# Altium PCB PS_PCB.PcbDoc
Units mil, origin at the board's own origin, x right, y up, seen from the top; angles counter-clockwise.
Board outline 2200 x 863.97 mil, 4 copper layers (Top Layer, GND, +12, Bottom Layer), stack 23.756 mil thick; 11 components, 5 nets, 28 pads, 5 vias.
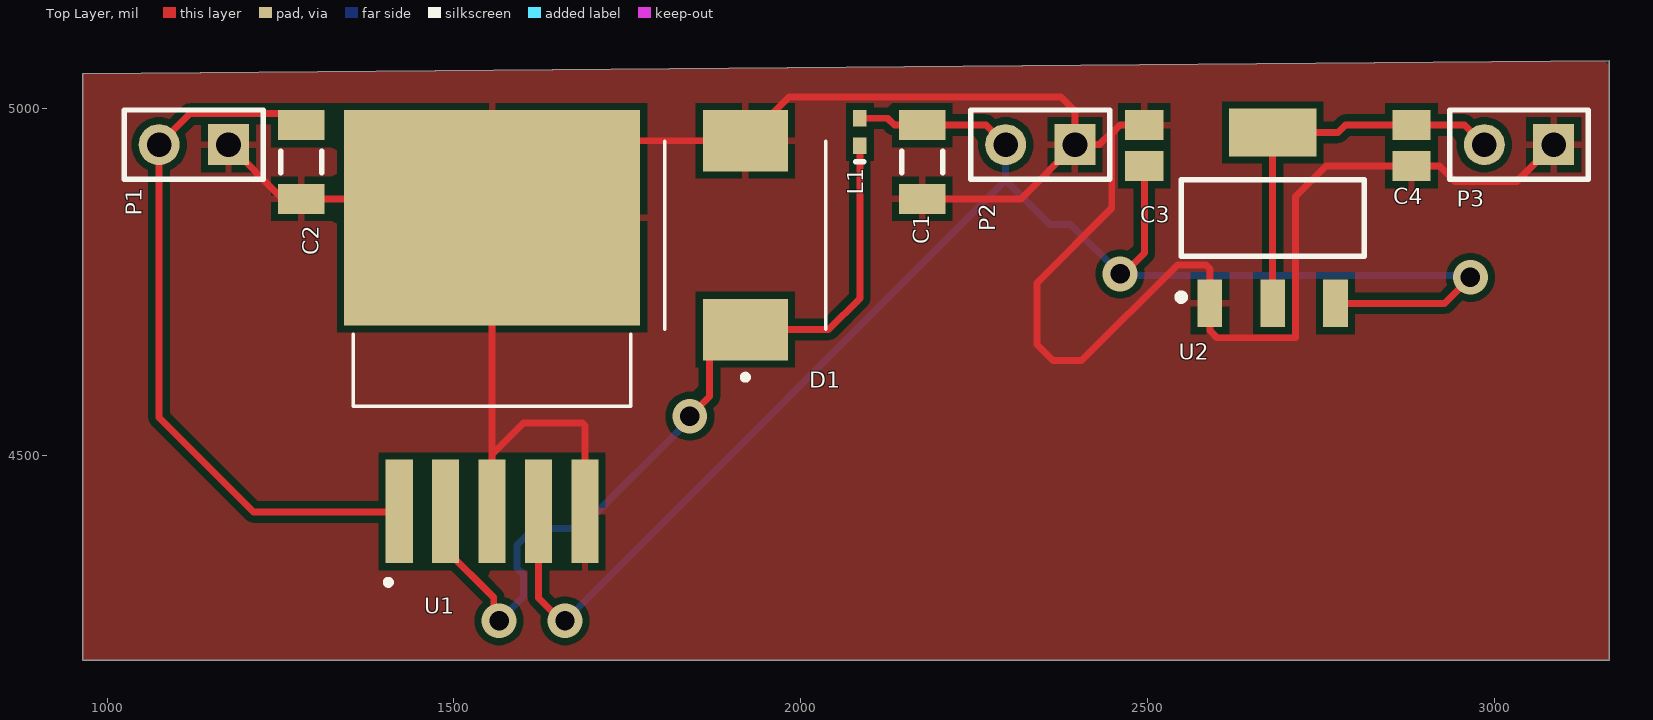
[diagram p0: Top Layer view]
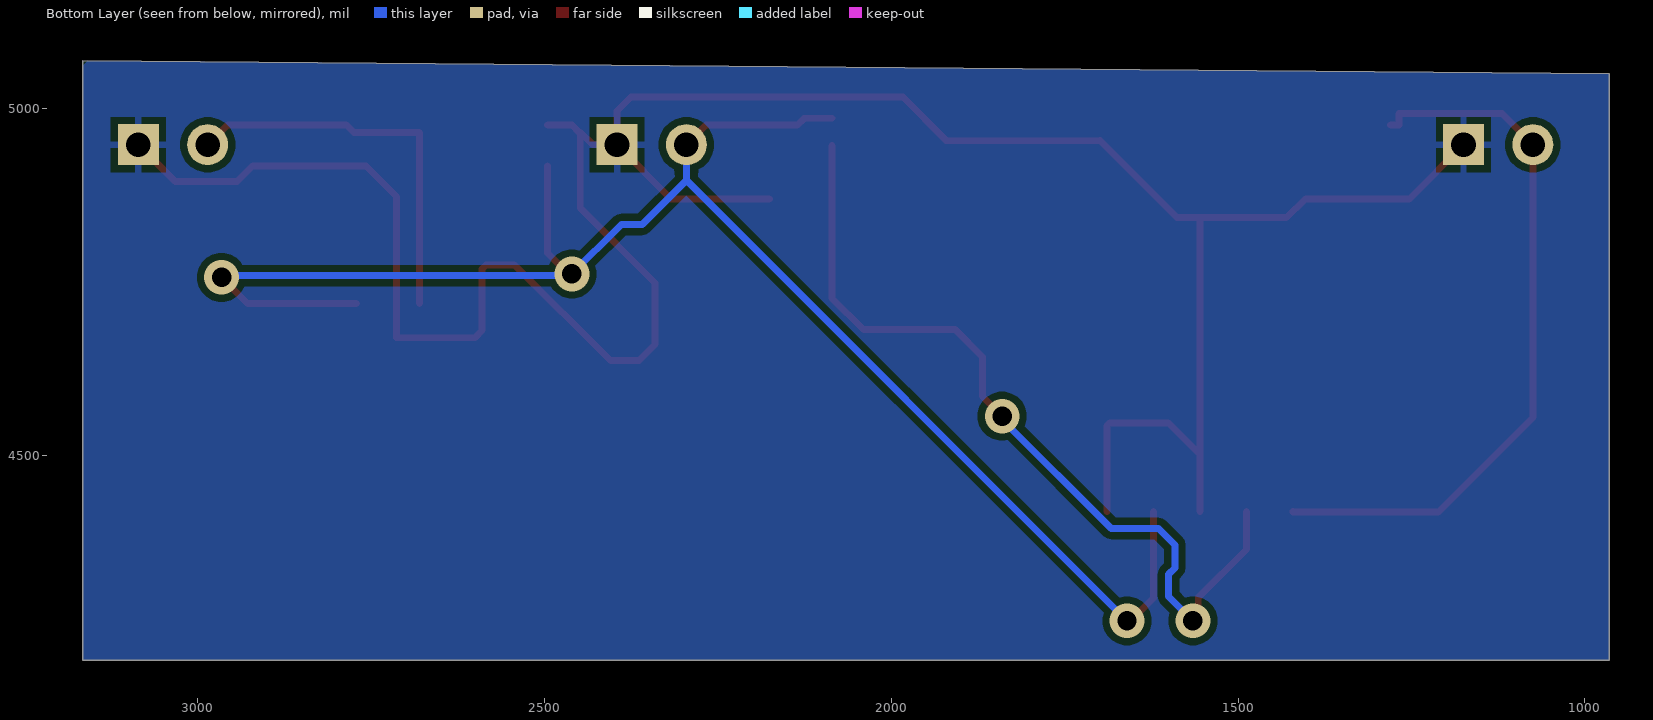
[diagram p1: Bottom Layer view, seen from below]
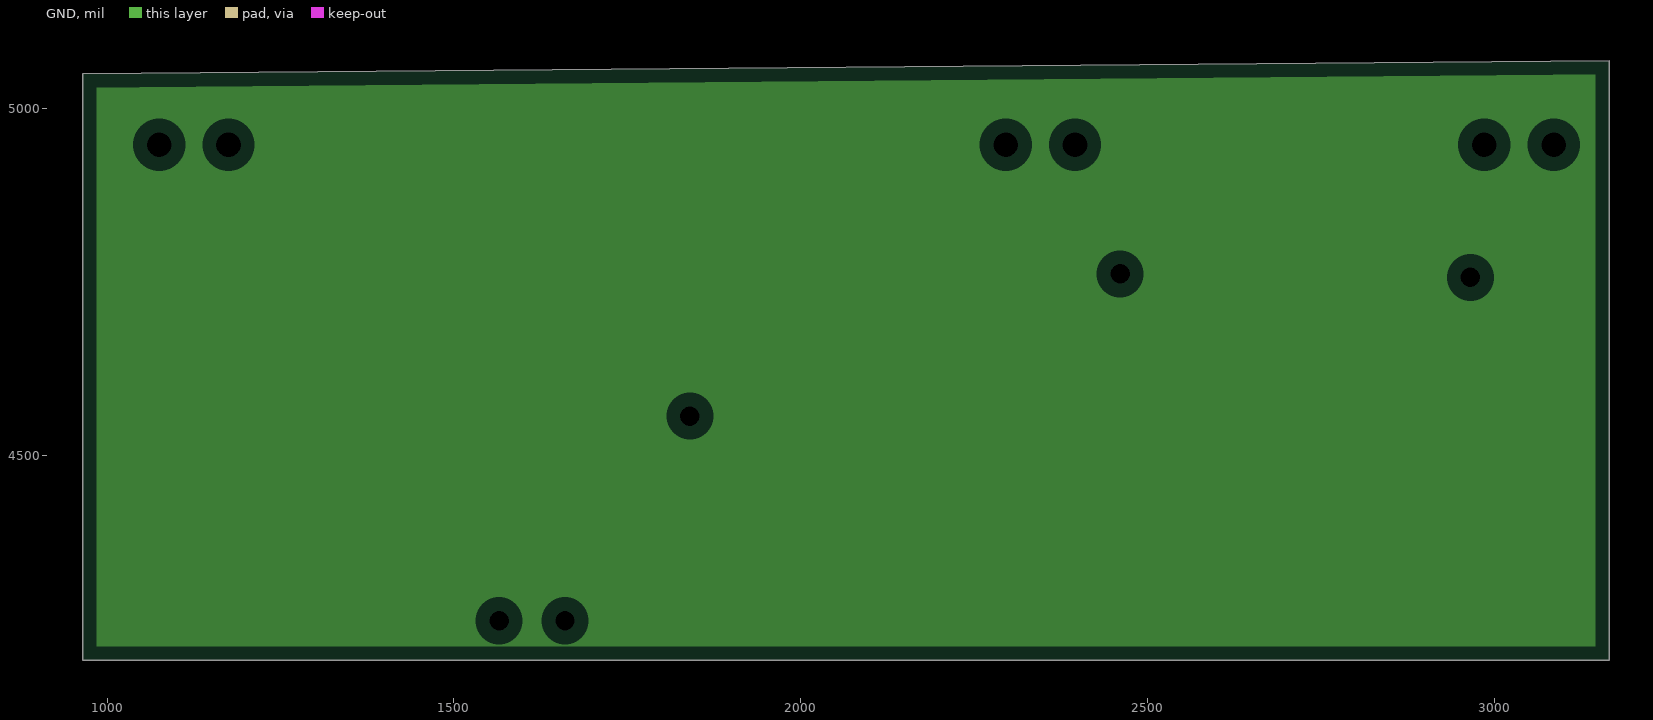
[diagram p2: GND, clearances drawn from the general rule]
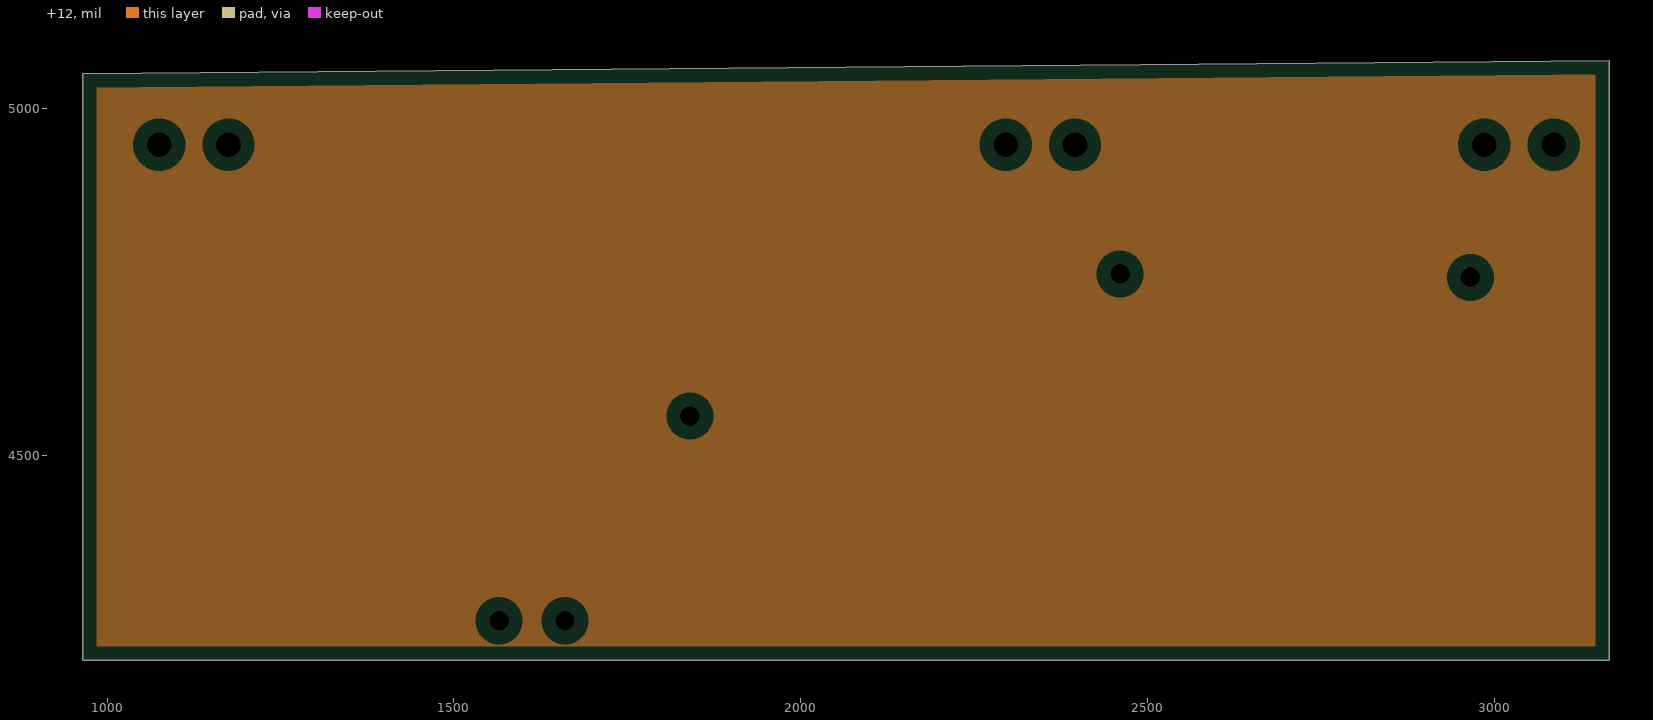
[diagram p3: +12, clearances drawn from the general rule]

## Layer stack, top to bottom
Top Solder: solder mask 0.4, Solder Resist, Dk 3.5
Top Layer: signal copper 1.4
Dielectric 2: prepreg 2.8, PP-006, Dk 4.1
GND: plane copper 1.378
Dielectric 1: dielectric 12.6, FR-4, Dk 4.8
+12: plane copper 1.378
Dielectric 3: prepreg 2.8, PP-006, Dk 4.1
Bottom Layer: signal copper 1.4
Bottom Solder: solder mask 0.4, Solder Resist, Dk 3.5

## Board outline
965,5050 965,4205 3165,4205 3165,5068.97

## Design rules (kind name [scope] priority, off if disabled: settings)
Clearance [All] p1: gap=10 ignorepadtopadclearanceinfootprint=FALSE
MinimumSolderMaskSliver [All] p1: minsoldermaskwidth=2
PlaneClearance [All] p1: clearance=20
PlaneConnect [All] p1: planeconnectstyle=Relief reliefexpansion=20 reliefentries=4 reliefconductorwidth=10 reliefairgap=10
PolygonConnect [All] p1: connectstyle=Relief reliefconductorwidth=10 reliefentries=4 polygonreliefangle="90 Angle" airgapwidth=10
RoutingVias [All] p1: holewidth=28 width=50 viastyle="Through Hole" minholewidth=28 minwidth=50 maxholewidth=28 maxwidth=50
SilkToSolderMaskClearance [IsPad] p1: minsilkscreentomaskgap=5 clearancetoexposedcopper=TRUE
SolderMaskExpansion SolderMaskExpansion_1 [All] p1: expansion=4 istentingtop=FALSE
SolderMaskExpansion [All] p2: expansion=4 istentingtop=FALSE
SupplyNets "Schematic Supply Nets_3" [InNet('3.3V')] p1: voltage=0.000
SupplyNets "Schematic Supply Nets_2" [InNet('+5V')] p2: voltage=0.000
SupplyNets "Schematic Supply Nets_1" [InNet('+12')] p3: voltage=0.000
SupplyNets "Schematic Supply Nets" [InNet('GND')] p4: voltage=0.000
UnRoutedNet [All] p1: checkbadconnections=TRUE
Width [All] p1: maxlimit=30 minlimit=10 preferedwidth=10 minimp=50.000000 maximp=50.000000 favimp=50.000000
25 further rules are at their usual default settings.

## Components (designator, comment, footprint, x,y, rotation, side; value= is the part's Value field where it differs from the comment)
C1 "Cap Semi" C1206 2175,4923.15 r90 top value=100pF
C2 "Cap Semi" C1206 1280,4923.15 r90 top value=100pF
C3 "Cap Pol3" C0805 2495,4946.77 r90 top value=10pF
C4 "Cap Pol3" C0805 2880,4946.77 r270 top value=10pF
D1 "MBRS340" DIOM7959X261N 1920,4817.64 r90 top
L1 "Inductor" 0402-A 2085,4966.46 r90 top value=33uH
P1 "Header 2" HDR1X2 1175,4948.02 r180 top
P2 "Header 2" HDR1X2 2395,4948.02 r180 top
P3 "Header 2" HDR1X2 3085,4948.02 r180 top
U1 "LM2596S-5.0" TO170P1524X483-6N 1555,4671.58 r90 top
U2 "LM1117IMP-3.3/NOPB" DCY0004A_N 2680,4842.47 r90 top

## Footprints (in the part's own frame and the unit in brackets; to place one, negate y for a bottom-side part, rotate by r counter-clockwise, add the part's x,y. Pads: shape width x height; smd on the part's side, far side on the other; paste and mask are expansions set on the pad)
0402-A [mm] "Chip Inductor, Body 1.0x0.5mm, IPC High Density"
  rect 0.6x0.5 smd: 1(-0.5,0) 2(0.5,0)
  silkscreen extent -1.1,-0.15 -1.1,0.15, body extent -0.55,-0.3 0.55,0.3, height 0.55
C0805 [mm] "Chip Capacitor, Body 2.0x1.3mm, IPC High Density"
  rect 1.1x1.4 smd: 1(-0.75,0) 2(0.75,0)
  body extent -1.1,-0.72 1.1,0.72, height 1.4
C1206 [mm] "Chip Capacitor, Body 3.2x1.6mm, IPC High Density"
  rect 1.1x1.7 smd: 1(-1.35,0) 2(1.35,0)
  silkscreen extent -0.4,-0.75 0.4,0.75, body extent -1.7,-0.9 1.7,0.9, height 1.3
DCY0004A_N [mm]
  rect 1.75x0.9 smd paste+0 mask+0.051: 1(-3.125,2.3) 2(-3.125,0) 3(-3.125,-2.3)
  rect 1.75x3.2 smd paste+0 mask+0.051: 4(3.125,0)
  silkscreen extent -3.02,-3.35 1.4,3.47
DIOM7959X261N [mm]
  rect 2.25x3.12 smd: A(3.455,0) C(-3.455,0)
  silkscreen extent -5.3,-2.95 3.44,2.95, body extent -3.98,-2.95 3.98,2.95, height 2.65
HDR1X2 [mm] "Connector; Header; 2 Position"
  rect 1.5x1.5 hole 0.9: 1(0,0)
  round 1.5 hole 0.9: 2(2.54,0)
  silkscreen extent -1.27,-1.27 3.81,1.27
TO170P1524X483-6N [mm]
  rect 3.79x0.99 smd: 1(-6.4,3.4) 2(-6.4,1.7) 3(-6.4,0) 4(-6.4,-1.7) 5(-6.4,-3.4)
  rect 7.88x10.84 smd paste-6: 6(4.35,0)
  silkscreen extent -9.1,-5.08 0.09,5.08, body extent -7.18,-5.08 7.18,5.08, height 4.65

## Part data
C1 C2: "Capacitor (Semiconductor SIM Model)", LatestRevisionDate=29-May-2009, LatestRevisionNote="IPC-7351 Footprint Added.", PackageDescription="Chip Capacitor", PackageReference=C1206, Published=8-Jun-2000, Publisher="Altium Limited"
C3 C4: "Polarized Capacitor (Surface Mount)", LatestRevisionDate=29-May-2009, LatestRevisionNote="IPC-7351 Footprint Added.", PackageDescription="Chip Capacitor", PackageReference=C0805, Published=8-Jun-2000, Publisher="Altium Limited"
D1: "Diode 40 V 4A Surface Mount DO-214AB (SMC)", Package=None, Check_prices=https://www.snapeda.com/parts/MBRS340/Onsemi/view-part/?ref=eda, MF=onsemi, MP=MBRS340, SnapEDA_Link=https://www.snapeda.com/parts/MBRS340/Onsemi/view-part/?ref=snap
P1 P2 P3: "Header, 2-Pin", LatestRevisionDate=17-Jul-2002, LatestRevisionNote="Re-released for DXP Platform.", Publisher="Altium Limited"
U1: "SIMPLE SWITCHERÂ® 4.5V to 40V, 3A Low Component Count Step-Down Regulator", Package="TO-263-5 Texas Instruments", Check_prices=https://www.snapeda.com/parts/LM2596S-5.0/NOPB/Texas+Instruments/view-part/?ref=eda, MF="Texas Instruments", MP=LM2596S-5.0/NOPB, SnapEDA_Link=https://www.snapeda.com/parts/LM2596S-5.0/NOPB/Texas+Instruments/view-part/?ref=snap
U2: library part LM1117IMP-3.3NOPB, "800-mA 15-V linear voltage regulator 4-SOT-223 -40 to 125", Manufacturer_Name="Texas Instruments", Copyright="Copyright (C) 2025 Ultra Librarian. All rights reserved.", Manufacturer_Part_Number=LM1117IMP-3.3/NOPB, RefDes=RefDes, TYPE=TYPE
L1: Code_IEC=1005, Code_JEITA=0402, LatestRevisionDate=29-May-2009, LatestRevisionNote="IPC-7351 Footprint Added.", PackageDescription="Chip Inductor", PackageReference=0402-A, Published=8-Jun-2000, Publisher="Altium Limited"

## Via types
v1: diameter 50, hole 28, Top Layer to Bottom Layer, 5 vias

## Nets (pads, with @x,y where several pads share a name; then routed paths per layer and width w, separated by ;. In a path a pad name is that pad's centre, name@x,y a point inside that pad or via, vN(x,y) a via of type N, cw(c..) or ccw(c..) an arc to the next point about the centre after c; other vN are vias at no path point)
3.3V: C4.1 P3.2 U2.2 U2.4 | length 567.2
  Top Layer w10: U2.2 U2.4 2774,4965.5 2784.8,4976.3 C4.1 2956.72,4976.3 P3.2
+5V: C1.2 C3.1 L1.2 P2.2 U1.4 U2.3 | length 2469.5
  Top Layer w10: U1.4 1621.93,4294.84 v1@1660,4256.77 ; L1.2 2125,4986.14 2134.84,4976.3 C1.2 2266.72,4976.3 P2.2 ; v1(2460,4761.77) 2465,4761.77 2495,4791.77 C3.1 ; U2.3 2927.67,4719.44 v1(2965,4756.77)
  Bottom Layer w10: v1@1660,4256.77 v1(1660,4261.77) 2295,4896.77 ; P2.2 2295,4896.77 ; v1(2965,4756.77) 2962.5,4759.27 2462.5,4759.27 2388.67,4833.1 2358.67,4833.1 2295,4896.77
+12: C2.2 P1.2 U1.1 | length 1036.6
  Top Layer w10: C2.2 1268,4976.3 1268,4992.77 1119.76,4992.77 P1.2 1075,4554.77 1211,4418.77 1421.14,4418.77 U1.1
GND: C1.1 C2.1 C3.2 C4.2 D1.A P1.1 P2.1 P3.1 U1.3 U1.5 U1.6 U2.1 | length 3966
  Top Layer w10: P1.1 1253.02,4870 C2.1 1403,4870 1430.17,4842.83 U1.6 ; U1.3 1555,4501.77 ; U1.5 1688.86,4542.91 1685,4546.77 1600,4546.77 1555,4501.77 ; C1.1 2316.98,4870 P2.1 ; 2447.14,4965.16 2430,4948.02 P2.1 ; C3.2 2460,4976.3 2448,4964.3 2448,4856.77 2340,4748.77 2340,4660.2 2363.43,4636.77 2404.52,4636.77 2542.5,4774.75 2583.59,4774.75 2589.45,4768.89 2589.45,4680.32 2600,4669.77 2713,4669.77 2713,4873.24 2757,4917.24 C4.2 2920.53,4917.24 2943,4894.77 3031.76,4894.77 P3.1 ; 1555,4501.77 U1.6 ; U1.6 1588,4842.83 1698.94,4953.77 1699.05,4953.66 D1.A 1983.11,5016.77 2375,5016.77 2395,4996.77 P2.1
NetD1_C: D1.C L1.1 U1.2 | length 1215.4
  Top Layer w10: U1.2 1488.07,4364.49 1557.35,4295.21 1557.35,4269.43 v1(1565,4261.77) ; v1(1840,4556.77) 1868.28,4585.06 1868.28,4642.32 1907.58,4681.61 2040,4681.61 2085,4726.61 L1.1
  Bottom Layer w10: v1(1565,4261.77) 1600.29,4297.06 1600.29,4328.91 1591,4338.2 1591,4371.34 1614.43,4394.77 1682.72,4394.77 1840,4552.06 v1(1840,4556.77)

## Polygon pours and split planes (outlines as drawn)
GND on Bottom Layer "GND_L04_P004" (solid, remove dead copper, pour order 4): 965,5050 965,4205 3165,4205 3165,5068.97
GND on Top Layer "NONET_L01_P000" (solid, remove dead copper, pour order 3): 965,5050 965,4205 3165,4205 3165,5068.97
no net on +12 (split plane): 3144.9,4225.1 985.1,4225.1 985.1,5030.08 3144.9,5048.69
no net on GND (split plane): 3144.9,4225.1 985.1,4225.1 985.1,5030.08 3144.9,5048.69